# Altium PCB switcher_module_v2.PcbDoc
Units mm, origin at the board's own origin, x right, y up, seen from the top; angles counter-clockwise.
Board outline 30.35 x 27.31 mm, 2 copper layers (Top Layer, Bottom Layer); 11 components, 11 nets, 48 pads, 9 vias.
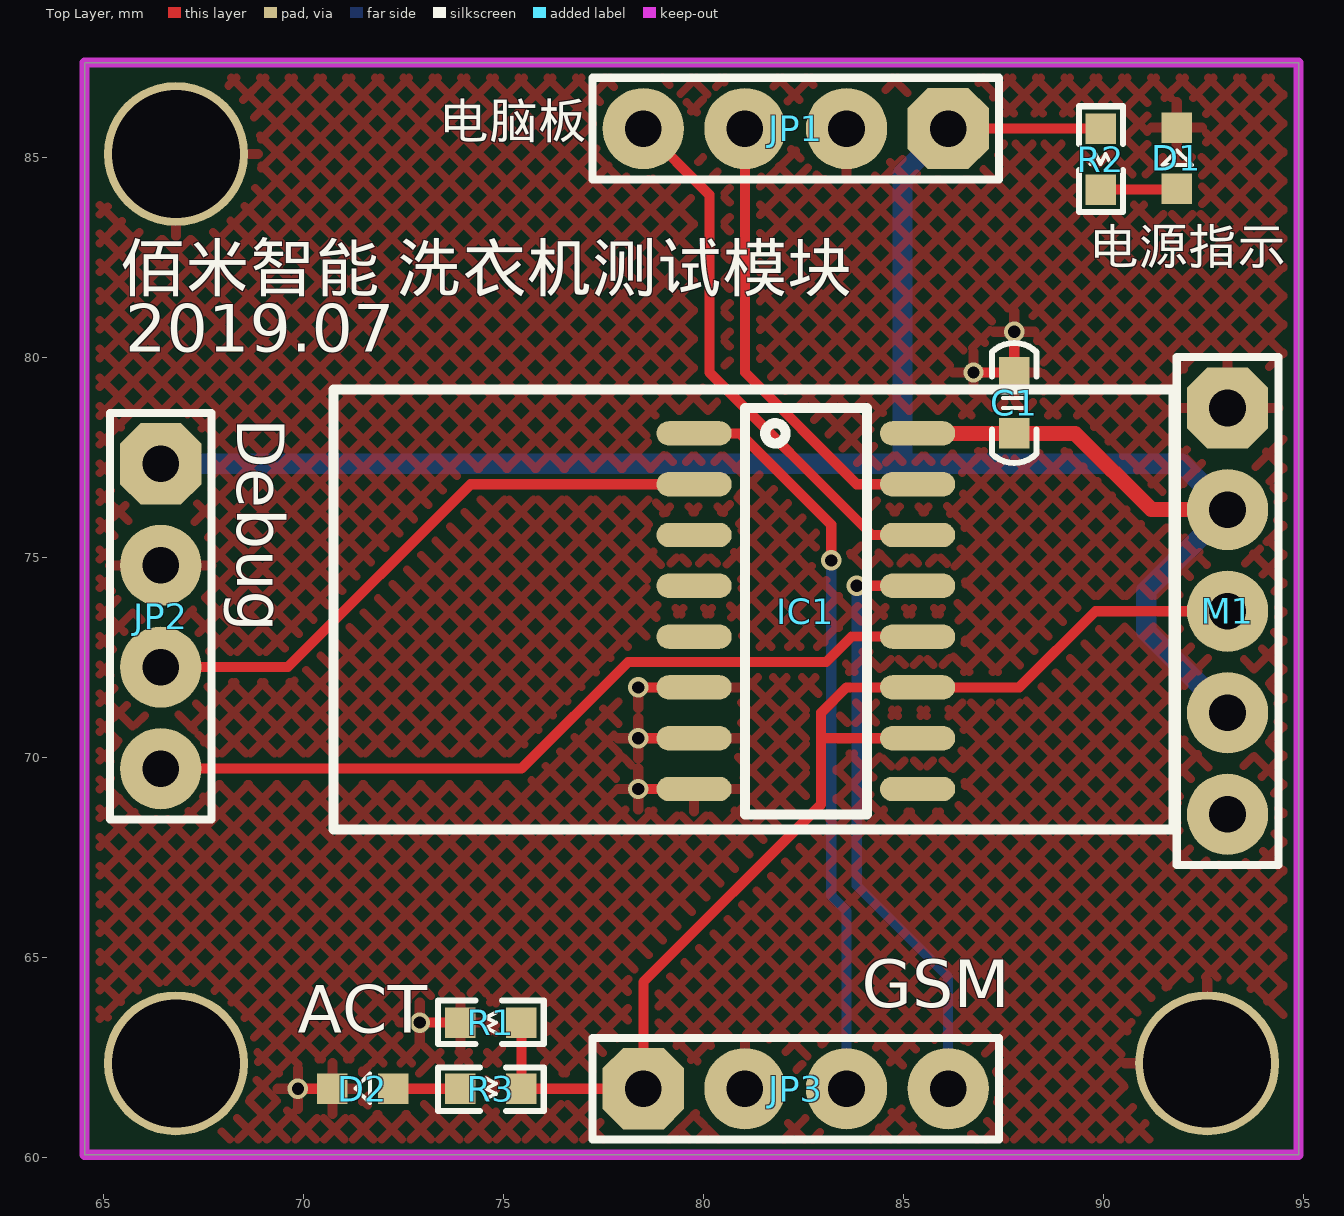
[diagram p0: Top Layer view]
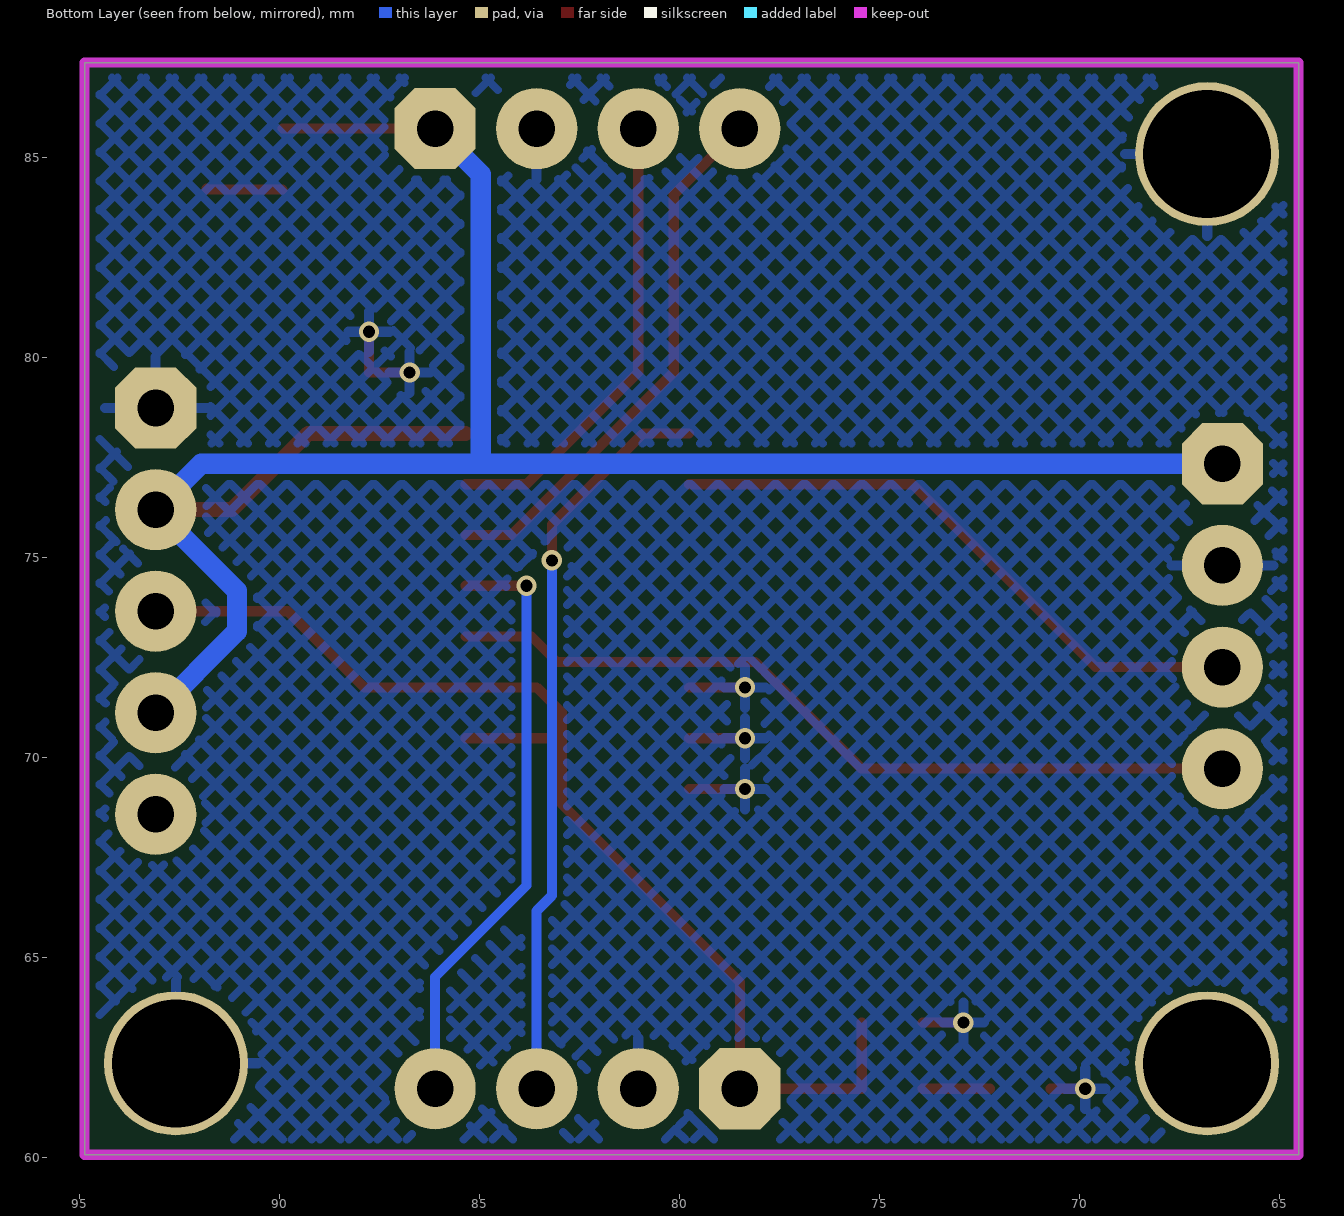
[diagram p1: Bottom Layer view, seen from below]

## Layer stack, top to bottom
Top Solder: solder mask 0.0102, Solder Resist, Dk 3.5
Top Layer: signal copper 0.0356
Dielectric 1: dielectric 0.32, FR-4, Dk 4.8
Bottom Layer: signal copper 0.0356
Bottom Solder: solder mask 0.0102, Solder Resist, Dk 3.5

## Board outline
64.516,60.071 64.516,87.376 94.869,87.376 94.869,60.071

## Design rules (kind name [scope] priority, off if disabled: settings)
Clearance [All] p1: gap=0.152 ignorepadtopadclearanceinfootprint=FALSE except(0: Arc-Hole Track-Hole SMDPad-Hole THPad-Hole Via-Hole Fill-Hole Poly-Hole Region-Hole Text-Hole; 0.254: Arc-Text Track-Text SMDPad-Text THPad-Text Via-Text Fill-Text Poly-Text Region-Text Text-Text)
PolygonConnect [All] p1: connectstyle=Relief reliefconductorwidth=0.254 reliefentries=4 polygonreliefangle="90 Angle" airgapwidth=0.254
RoutingVias [All] p1: holewidth=0.711 width=1.27 viastyle="Through Hole" minholewidth=0.305 minwidth=0.508 maxholewidth=0.711 maxwidth=1.27
SolderMaskExpansion [All] p1: expansion=0.102
Width [All] p1: maxlimit=0.508 minlimit=0.254 preferedwidth=0.254 minimp=50.000000 maximp=50.000000 favimp=50.000000
30 further rules are at their usual default settings.

## Components (designator, comment, footprint, x,y, rotation, side; value= is the part's Value field where it differs from the comment)
C1 "0.1uF" 0603_C 87.757,78.867 r90 top value=104
D1 "LED" 0603_LED 91.821,84.963 r90 top
D2 "LED" 0603_LED 71.501,61.722 r180 top
IC1 "CD4053BC" SOIC-16 79.756,78.105 r270 top
JP1 "洗衣机端" header4 86.106,85.725 r180 top
JP2 "无线串口端（手动）" header4 66.421,77.343 r270 top
JP3 "联网模块端（联网）" header4 78.486,61.722 r0 top
M1 "遥控继电器模块" header5 93.091,78.74 r270 top
R1 "4.7K R0603" 0603_R 74.676,63.373 r0 top value=1K
R2 "2K R0603" 0603_R 89.916,84.963 r270 top value=1K
R3 "2K R0603" 0603_R 74.676,61.722 r180 top value=1K

## Footprints (in the part's own frame and the unit in brackets; to place one, negate y for a bottom-side part, rotate by r counter-clockwise, add the part's x,y. Pads: shape width x height; smd on the part's side, far side on the other; paste and mask are expansions set on the pad)
0603_C [mil] "Capacitor"
  rect 30x30 smd: 1(-30,0) 2(30,0)
  silkscreen extent -59,-22 59,22, body extent -51,-18 52,21, height 35
0603_LED [mil]
  rect 30x30 smd: 1(-29,0) 2(31,0)
  silkscreen extent -6,-15 9,14, body extent -31,-16 31,16, height 24
0603_R [mil]
  rect 30x30 smd: 1(-30,0) 2(30,0)
  silkscreen extent -52,-21 52,22, body extent -34,-19 34,19, height 39
header4 [mil]
  oct 80x80 hole 36: 1(0,0)
  round 80 hole 36: 2(100,0) 3(200,0) 4(300,0)
  silkscreen extent -50,-50 350,50
header5 [mil]
  oct 80x80 hole 36: 1(0,0)
  round 80 hole 36: 2(100,0) 3(200,0) 4(300,0) 5(400,0)
  silkscreen extent -50,-50 450,50, body extent -50,-50 450,50, height 398
SOIC-16 [mil]
  oval 24x74 smd: 1(0,0) 2(50,0) 3(100,0) 4(150,0) 5(200,0) 6(250,0) 7(300,0) 8(350,0) 9(350,220) 10(300,220) 11(250,220) 12(200,220) 13(150,220) 14(100,220) 15(50,220) 16(0,220)
  silkscreen extent -25,50 375,170, body extent -19,-5 367,223, height 69

## Part data
C1: library part CAP, "Capacitor", LatestRevisionDate=17-Jul-2002, LatestRevisionNote="Re-released for DXP Platform.", PackageReference=RAD-0.3, Published=8-Jun-2000, Publisher="Altium Limited"
D1 D2: "LED 发光二极管"
IC1: "Integrated Circuit", Manufacturer_Name="Texas Instruments", Mouser Part Number=N/A, Datasheet Link=https://pdf1.alldatasheet.com/datasheet-pdf/view/8183/NSC/CD4053BC.html, Height=5.08mm, Manufacturer_Part_Number=CD4053BC, Mouser Price/Stock=https://www.mouser.com/Search/Refine.aspx?Keyword=N%2FA
JP1 JP2 JP3: library part "HEADER 4"
M1: library part "HEADER 5"
R1 R2 R3: library part RES, "Resistor", Published=8-Jun-2000, Publisher="Altium Limited", Revision="July-2002: Re-released for DXP Platform."

## Free pads (board coordinates)
  round 3.6 hole 3.2: 2(66.802,62.357) 2(66.802,85.09) 2(92.583,62.357)

## Via types
v1: diameter 0.508, hole 0.305, Top Layer to Bottom Layer, tented both sides, 9 vias

## Nets (pads, with @x,y where several pads share a name; then routed paths per layer and width w, separated by ;. In a path a pad name is that pad's centre, name@x,y a point inside that pad or via, vN(x,y) a via of type N, cw(c..) or ccw(c..) an arc to the next point about the centre after c; other vN are vias at no path point)
GND: C1.2 D1.2 D2.2 IC1.6 IC1.7 IC1.8 JP1.2 JP2.2 JP3.2 M1.1 pad.2@66.802,85.09 pad.2@92.583,62.357 R1.1 | length 8.1
  Top Layer w0.254: v1(69.85,61.722) D2.2 ; v1(72.898,63.373) R1.1 ; v1(78.359,69.215) IC1.8 ; v1(78.359,70.485) IC1.7 ; v1(78.359,71.755) IC1.6 ; v1(86.741,79.629) C1.2 v1(87.757,80.645)
LOGIC: IC1.10 IC1.11 JP3.1 M1.3 R1.2 R3.1 | length 29.6
  Top Layer w0.254: R1.2 R3.1 JP3.1 78.486,64.389 82.931,68.834 82.931,70.485 ; IC1.10 82.931,70.485 ; M1.3 89.789,73.66 87.884,71.755 IC1.11 83.566,71.755 82.931,71.12 82.931,70.485
NetD1_1: D1.1 R2.2 | length 1.9
  Top Layer w0.254: R2.2 91.796,84.201 D1.1
NetD2_1: D2.1 R3.2 | length 1.7
  Top Layer w0.254: D2.1 R3.2
P5V: C1.1 IC1.16 JP1.1 JP2.1 M1.2 M1.4 R2.1 | length 55.1
  Top Layer w0.254: JP1.1 R2.1
  Top Layer w0.381: IC1.16 C1.1 89.281,78.105 91.186,76.2 M1.2
  Bottom Layer w0.508: JP2.1 84.963,77.343 ; JP1.1 84.963,84.582 84.963,77.343 ; M1.4 91.059,73.152 91.059,74.168 M1.2 91.948,77.343 84.963,77.343
RX_1: IC1.2 JP2.3 | length 15.2
  Top Layer w0.254: JP2.3 69.596,72.263 74.168,76.835 IC1.2
RX_2: IC1.1 JP3.3 | length 18.6
  Top Layer w0.254: IC1.1 80.899,78.105 83.185,75.819 v1(83.185,74.93)
  Bottom Layer w0.254: v1(83.185,74.93) 83.185,66.548 83.566,66.167 JP3.3
RX_MASTER: IC1.15 JP1.3 | length 11.6
  Top Layer w0.254: JP1.3 81.026,79.629 83.82,76.835 IC1.15
TX_1: IC1.12 JP2.4 | length 20.3
  Top Layer w0.254: JP2.4 75.438,69.723 78.105,72.39 83.058,72.39 83.693,73.025 IC1.12
TX_2: IC1.13 JP3.4 | length 15
  Top Layer w0.254: v1(83.82,74.295) IC1.13
  Bottom Layer w0.254: v1(83.82,74.295) 83.82,66.802 86.106,64.516 JP3.4
TX_MASTER: IC1.14 JP1.4 | length 13.7
  Top Layer w0.254: JP1.4 80.137,84.074 80.137,79.629 84.201,75.565 IC1.14
pads on no net: IC1.3 IC1.4 IC1.5 IC1.9 M1.5

## Polygon pours and split planes (outlines as drawn)
GND on Bottom Layer "Bottom Layer-GND" (hatched 45Degree grid 0.508 track 0.203, remove dead copper, pour order 0): 64.008,74.549 64.008,87.884 95.504,87.884 95.504,59.436 63.627,59.436 63.627,64.77
GND on Top Layer "Top Layer-GND" (hatched 45Degree grid 0.508 track 0.203, remove dead copper, pour order 2): 63.754,88.392 63.754,59.182 95.885,59.182 95.885,88.011

## Keep-outs
Keep-Out Layer:
  lines w0.254: 64.516,60.071 64.516,66.548 64.516,87.376 94.869,87.376 94.869,60.071 64.516,60.071

## Silkscreen, mask and mechanical layers (free items; w line width, h text height)
Top Overlay:
  lines w0.254: 70.739,68.199 70.739,79.199 91.739,79.199 91.739,68.199 70.739,68.199
  text "电脑板" at 73.406,85.18 h1.52
  text "电源指示" at 89.662,82.042 h1.52
  text "佰米智能 洗衣机测试模块" at 65.405,81.28 h2.03
  text "2019.07" at 65.532,79.756 h2.03
  text "Debug" at 67.945,78.486 h2.03 r270
  text "GSM" at 83.947,63.373 h2.03
  text "ACT" at 69.85,62.738 h2.03